# Altium PCB FiltrosRF_R00.PcbDoc
Units mil, origin at the board's own origin, x right, y up, seen from the top; angles counter-clockwise.
Board outline 2362.2 x 2755.91 mil, 2 copper layers (Top Layer, Bottom Layer); 32 components, 39 nets, 138 pads, 780 vias.
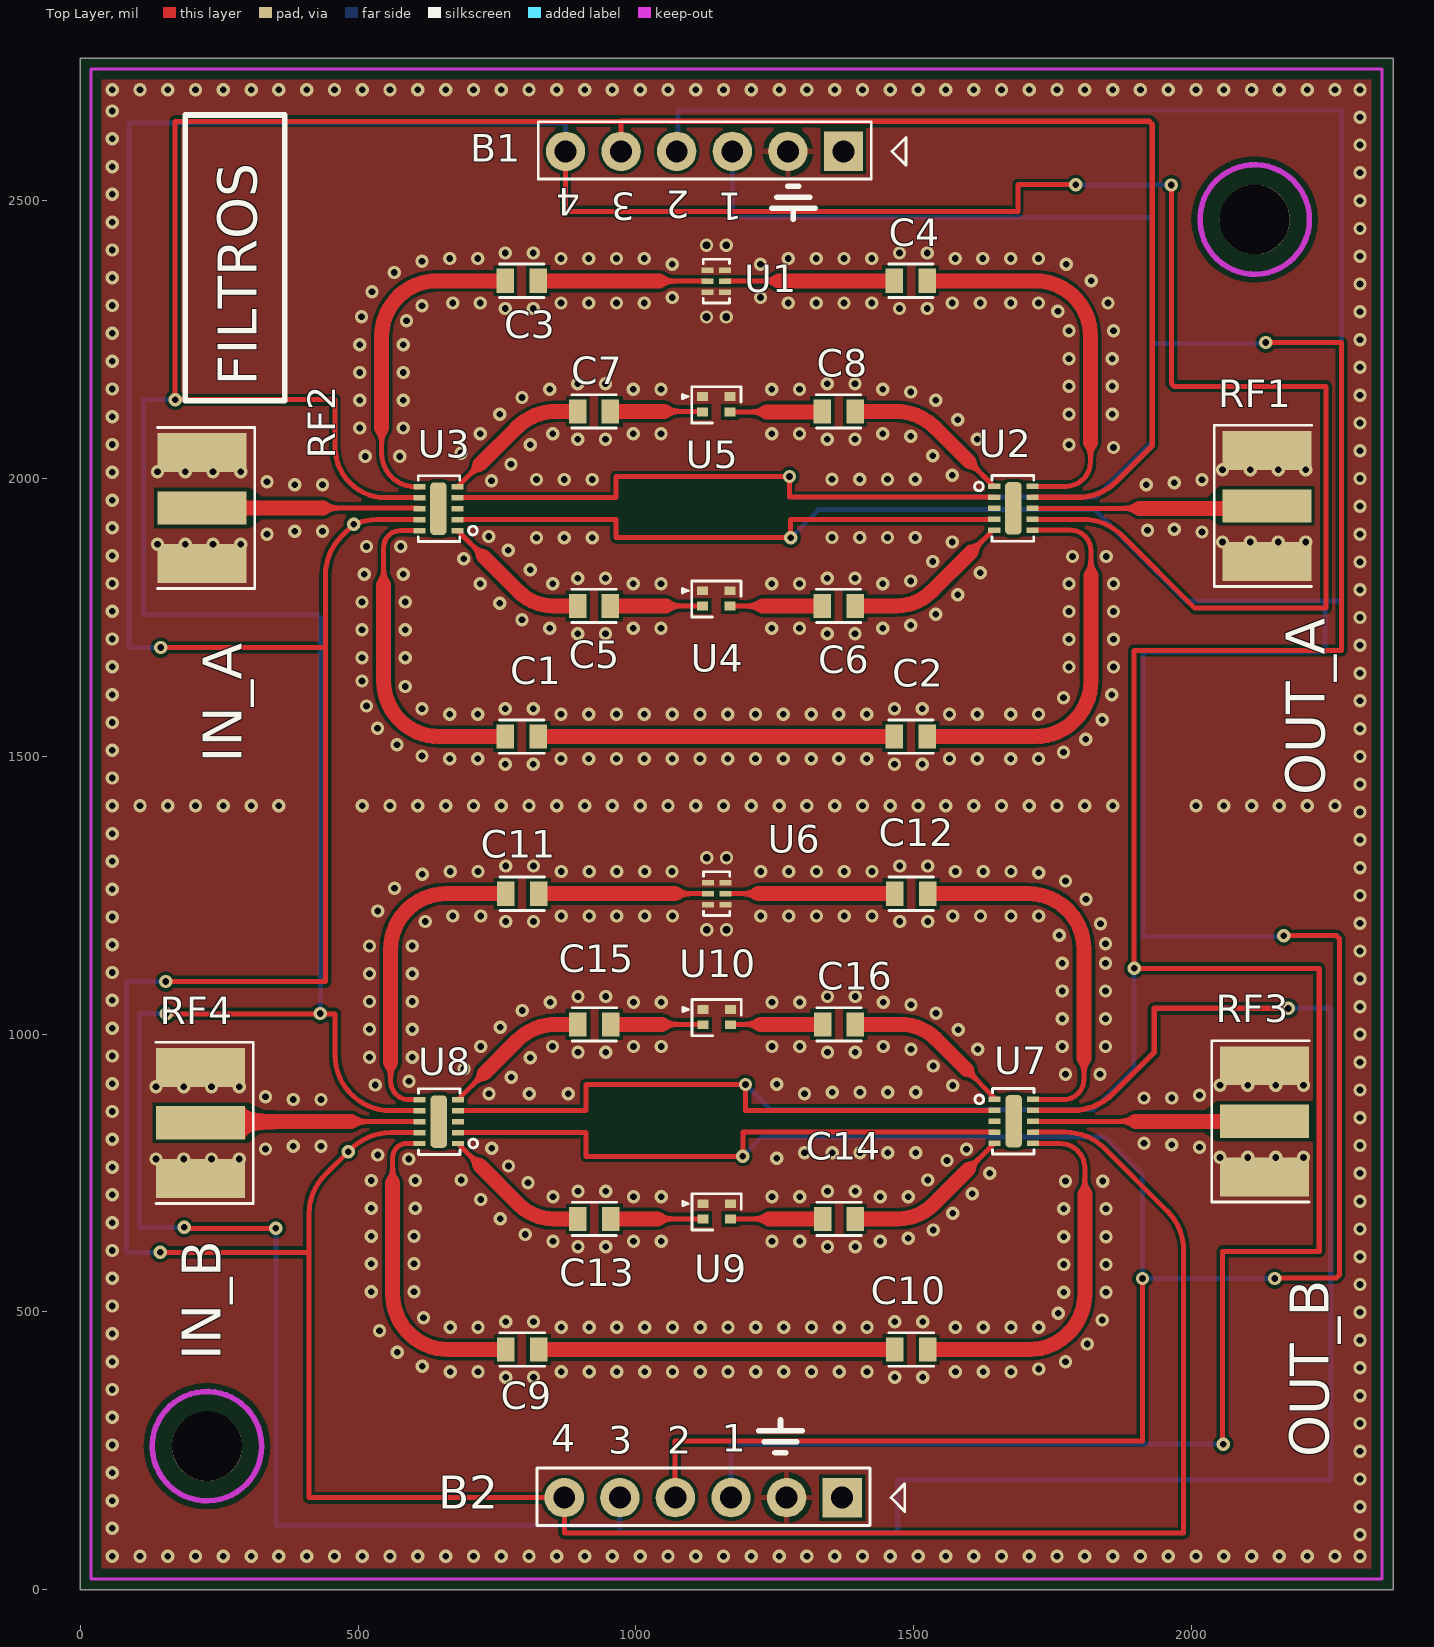
[diagram p0: Top Layer view]
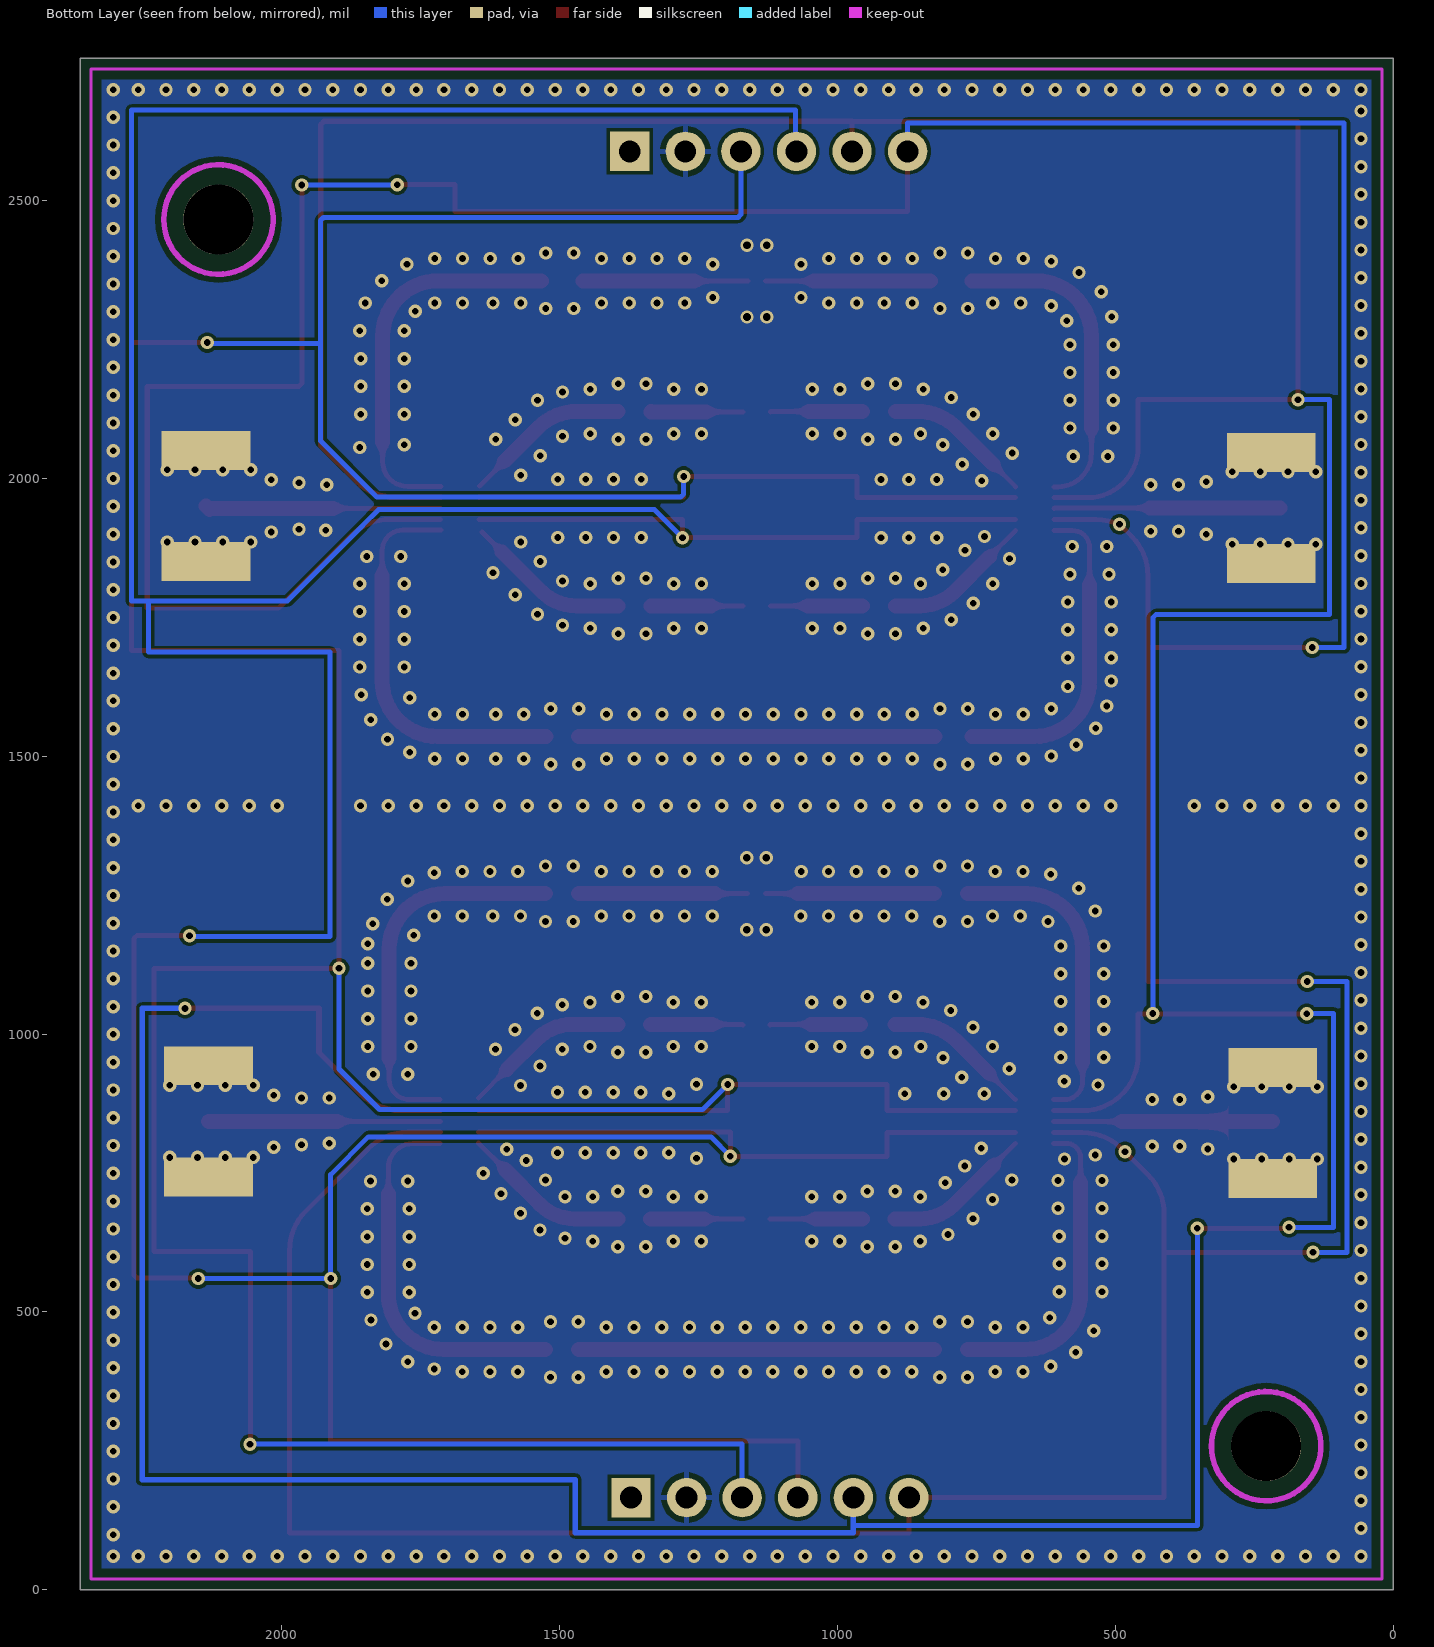
[diagram p1: Bottom Layer view, seen from below]
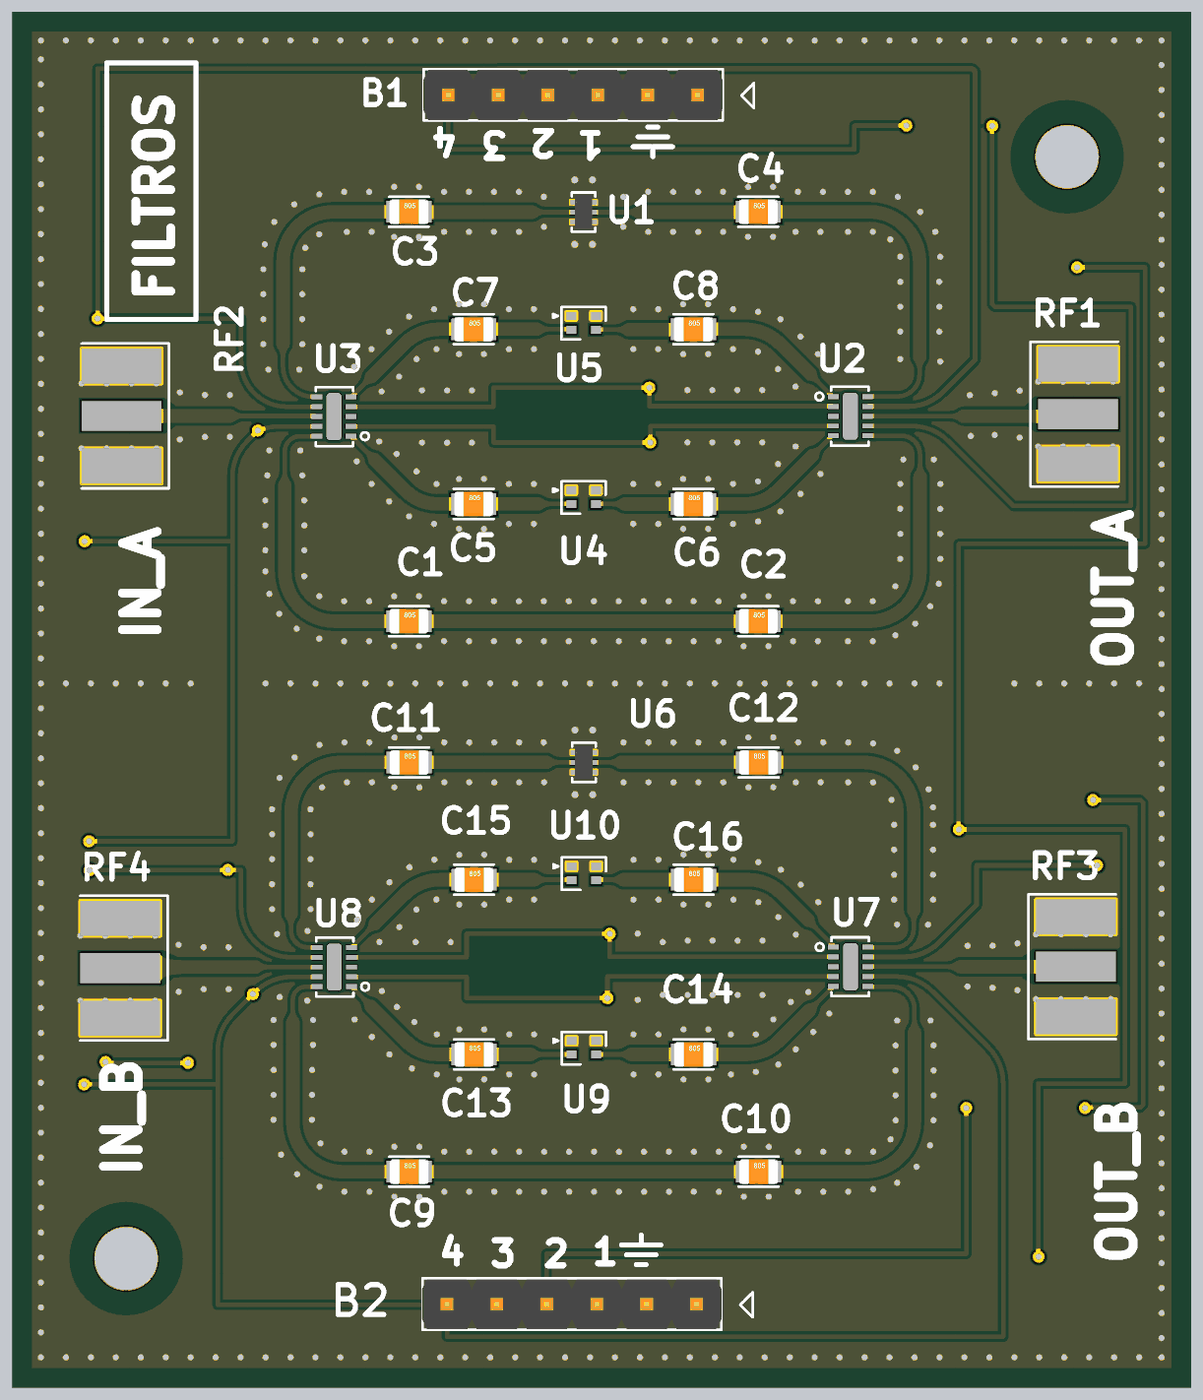
[diagram p2: 3D render of the assembled board from above, using the file's embedded part models]

## Layer stack, top to bottom
Top Solder: solder mask 0.4, Solder Resist, Dk 3.5
Top Layer: signal copper 1.4
Dielectric 1: dielectric 12.6, FR-4, Dk 4.8
Bottom Layer: signal copper 1.4
Bottom Solder: solder mask 0.4, Solder Resist, Dk 3.5

## Board outline
0,0 0,2755.91 2362.2,2755.91 2362.2,0

## Design rules (kind name [scope] priority, off if disabled: settings)
Clearance Clearance_1 [OnMid vs OnMid] p1: gap=6 ignorepadtopadclearanceinfootprint=FALSE sourcerule=39 cellrowname=All cellrowtype=0 cellcolname=All cellcoltype=0 innerlayers=TRUE
Clearance Clearance_2 [(ExistsOnLayer('Top Layer') Or ExistsOnLayer('Bottom Layer')) vs (ExistsOnLayer('Top Layer') Or ExistsOnLayer('Bottom Layer'))] p2: gap=6 ignorepadtopadclearanceinfootprint=FALSE sourcerule=39 cellrowname=All cellrowtype=0 cellcolname=All cellcoltype=0 outerlayers=TRUE
Clearance [All] p3: gap=10 ignorepadtopadclearanceinfootprint=FALSE ismatrix=TRUE
PolygonConnect [All] p1: thpad.connectstyle=Relief thpad.reliefconductorwidth=10 thpad.reliefentries=4 thpad.polygonreliefangle="90 Angle" thpad.airgapwidth=10 smdpad.connectstyle=Direct smdpad.reliefconductorwidth=10 smdpad.reliefentries=4 smdpad.polygonreliefangle="90 Angle" smdpad.airgapwidth=10 via.connectstyle=Direct via.reliefconductorwidth=10 via.reliefentries=4 via.polygonreliefangle="90 Angle" via.airgapwidth=10
RoutingVias RoutingViaStyle_1 [All] p1: holewidth=12 width=24 viastyle="Through Hole" minholewidth=12 minwidth=24 maxholewidth=24 maxwidth=50
RoutingVias [All] p2: holewidth=28 width=50 viastyle="Through Hole" minholewidth=28 minwidth=50 maxholewidth=28 maxwidth=50
SolderMaskExpansion [All] p1: expansion=4 istentingtop=FALSE
SupplyNets "Schematic Supply Nets" [InNet('GND')] p1: voltage=0.000
Width MaxMinWidth_1 [All] p1: maxlimit=100 minlimit=6 preferedwidth=8 minimp=50.000000 maximp=50.000000 favimp=50.000000
Width [All] p2: maxlimit=10 minlimit=10 preferedwidth=10
30 further rules are at their usual default settings.

## Components (designator, comment, footprint, x,y, rotation, side; value= is the part's Value field where it differs from the comment)
B1 "CONN_06P" "Header_M_1x6_0.1\"" 1373.38,2588.16 r180 top
B2 "CONN_06P" "Header_M_1x6_0.1\"" 1371.09,165.95 r180 top
C1 "Capacitor" C_0603 794.68,1535.28 r0 top value=47pF
C2 "Capacitor" C_0603 1494.68,1535.28 r0 top value=47pF
C3 "Capacitor" C_0603 794.68,2355.28 r0 top value=47pF
C4 "Capacitor" C_0603 1494.68,2355.28 r0 top value=47pF
C5 "Capacitor" C_0603 924.68,1770.28 r0 top value=47pF
C6 "Capacitor" C_0603 1364.68,1770.28 r0 top value=47pF
C7 "Capacitor" C_0603 924.68,2120.28 r0 top value=47pF
C8 "Capacitor" C_0603 1364.68,2120.28 r0 top value=47pF
C9 "Capacitor" C_0603 795.28,432.52 r0 top value=47pF
C10 "Capacitor" C_0603 1495.28,432.52 r0 top value=47pF
C11 "Capacitor" C_0603 795.28,1252.52 r0 top value=47pF
C12 "Capacitor" C_0603 1495.28,1252.52 r0 top value=47pF
C13 "Capacitor" C_0603 925.28,667.52 r0 top value=47pF
C14 "Capacitor" C_0603 1365.28,667.52 r0 top value=47pF
C15 "Capacitor" C_0603 925.28,1017.52 r0 top value=47pF
C16 "Capacitor" C_0603 1365.28,1017.52 r0 top value=47pF
RF1 "SMA_Connector" SMA_Connector 2135.38,1950.16 r270 top
RF2 "SMA_Connector" SMA_Connector 219.15,1946.46 r90 top
RF3 "SMA_Connector" SMA_Connector 2130.96,843.09 r270 top
RF4 "SMA_Connector" SMA_Connector 216.54,840.16 r90 top
U1 "3550LP14A0300001T" "Low Pass Filter 0603 6 Pins" 1144.68,2354.72 r0 top
U2 "SKY13322-375LF" "SP4T Switch RF" 1644.68,1985.28 r0 top
U3 "SKY13322-375LF" "SP4T Switch RF" 679.13,1905.91 r180 top
U4 "LP0603A-XXXX-ANTR" "Low Pass Filter 0603 4 Pins" 1144.68,1783.86 r0 top
U5 "LP0603A-XXXX-ANTR" "Low Pass Filter 0603 4 Pins" 1144.68,2133.07 r0 top
U6 "3550LP14A0300001T" "Low Pass Filter 0603 6 Pins" 1145.28,1252.52 r0 top
U7 "SKY13322-375LF" "SP4T Switch RF" 1645.28,882.52 r0 top
U8 "SKY13322-375LF" "SP4T Switch RF" 679.72,803.15 r180 top
U9 "LP0603A-XXXX-ANTR" "Low Pass Filter 0603 4 Pins" 1145.28,681.1 r0 top
U10 "LP0603A-XXXX-ANTR" "Low Pass Filter 0603 4 Pins" 1145.28,1030.52 r0 top

## Footprints (in the part's own frame and the unit in brackets; to place one, negate y for a bottom-side part, rotate by r counter-clockwise, add the part's x,y. Pads: shape width x height; smd on the part's side, far side on the other; paste and mask are expansions set on the pad)
C_0603 [mm] "Chip Capacitor, 2-Leads,"
  rect 0.8x1.1 smd: 1(-0.75,0) 2(0.75,0)
  silkscreen extent -1.02,-0.76 1.02,0.76, body extent -1,-0.62 1,0.63, height 0.78
"Header_M_1x6_0.1\"" [mm] "Header Male 1 x 6 Vias Pitch 100mils"
  rect 1.8x1.8 hole 1: 1(0,0)
  round 1.8 hole 1: 2(2.54,0) 3(5.08,0) 4(7.62,0) 5(10.16,0) 6(12.7,0)
  silkscreen extent -2.86,-1.35 13.95,1.27, body extent -1.27,-1.3 13.97,1.24, height 8.47
"Low Pass Filter 0603 4 Pins" [mm]
  rect 0.5x0.4 smd: 1(-0.625,0.35) 2(-0.625,-0.35) 3(0.625,-0.35) 4(0.625,0.35)
  silkscreen extent -1.55,-0.85 1.12,0.8
"Low Pass Filter 0603 6 Pins" [mm]
  rect 0.55x0.25 smd mask+0.06: 1(-0.4,0.5) 2(-0.4,0) 3(-0.4,-0.5) 4(0.4,-0.5) 5(0.4,0) 6(0.4,0.5)
  silkscreen extent -0.6,-1 0.6,1, body extent -0.45,-0.85 0.45,0.85, height 0.71
SMA_Connector [mil] "SMA PCB Connector 1.6mm / PN: EMPCB.CSMAFSTJ.A"
  rect 60x160 smd: 1(0,0)
  rect 70x160 smd: 2(-100,0) 2(100,0)
  rect 70x160 smd far side: 2(-100,0) 2(100,0)
  silkscreen extent -145,-95 145,80, body extent -121,-60 121,80, height 10
"SP4T Switch RF" [mm]
  rect 0.55x0.25 smd mask+0.05: 1(0,0) 2(0,-0.5) 3(0,-1) 4(0,-1.5) 5(0,-2) 6(1.75,-2) 7(1.75,-1.5) 8(1.75,-1) 9(1.75,-0.5) 10(1.75,0)
  rrect50% 0.76x2.4 smd mask+0.05: ""(0.875,-1)
  silkscreen extent -0.9,-2.5 1.8,0.5

## Part data
B1 B2: "Connector Generic 4 Vias"
RF1 RF2 RF3 RF4: "Connector SMA"
U1 U6: "RF FILTER LOW PASS  0603"
U2 U3 U7 U8: "RF Switch IC General Purpose SP4T 6 GHz 50Ohm 10-MLPD (3x2)"
U4 U5 U9 U10: "RF FILTER 0603"
C1 C2 C3 C4 C5 C6 C7 C8 C9 C10 C11 C12 C13 C14 C15 C16: SimulationGenericComponent=True

## Free pads (board coordinates)
  round 125.98 hole 125.98: ""(228.28,258.52) ""(2113.28,2465.52)

## Via types
v1: diameter 24, hole 12, Top Layer to Bottom Layer, tented top, 749 vias
v2: diameter 24, hole 12, Top Layer to Bottom Layer, 23 vias
v3: diameter 24, hole 13.78, Top Layer to Bottom Layer, tented top, 4 vias
v4: diameter 24.02, hole 13.78, Top Layer to Bottom Layer, tented top, 4 vias

## Nets (pads, with @x,y where several pads share a name; then routed paths per layer and width w, separated by ;. In a path a pad name is that pad's centre, name@x,y a point inside that pad or via, vN(x,y) a via of type N, cw(c..) or ccw(c..) an arc to the next point about the centre after c; other vN are vias at no path point)
1A_IN: C7.1 U3.5 | length 267.9
  Top Layer w9: U3.5 719.68,2025.2
  Top Layer w27: 719.68,2025.2 785.47,2090.99 cw(c856.19,2020.28) 856.19,2120.28 C7.1
1A_OUT: C6.2 U2.5 | length 296.2
  Top Layer w9: 1602.87,1867.04 U2.5@1639.13,1903.3
  Top Layer w27: C6.2 1469.01,1770.28 ccw(c1469.01,1859.84) 1532.34,1796.51 1602.87,1867.04
1B_IN: C15.1 U8.5 | length 267.9
  Top Layer w9: U8.5 727.54,929.7
  Top Layer w27: 727.54,929.7 786.06,988.23 cw(c856.78,917.52) 856.78,1017.52 C15.1
1B_OUT: C14.2 U7.5 | length 303
  Top Layer w9: 1597.78,756.28 U7.5
  Top Layer w27: C14.2 1471.79,667.52 ccw(c1471.79,757.38) 1535.34,693.84 1597.78,756.28
2A_IN: C5.1 U3.1 | length 268.4
  Top Layer w9: U3.1 726.38,1858.66
  Top Layer w27: 726.38,1858.66 789.21,1795.82 ccw(c850.9,1857.51) 850.9,1770.28 C5.1
2A_OUT: C8.2 U2.1 | length 300.3
  Top Layer w9: 1598.72,2030.61 U2.1@1643.21,1986.12
  Top Layer w27: C8.2 1467.63,2120.28 cw(c1467.63,2020.28) 1538.34,2090.99 1598.72,2030.61
2B_IN: C13.1 U8.1 | length 268.4
  Top Layer w9: U8.1 719.29,763.58
  Top Layer w27: 719.29,763.58 789.81,693.07 ccw(c851.49,754.75) 851.49,667.52 C13.1
2B_OUT: C16.2 U7.1 | length 302.2
  Top Layer w9: 1594.49,936.61 U7.1@1645.67,884.65
  Top Layer w27: C16.2 1475.78,1017.52 cw(c1475.78,926.26) 1540.31,990.79 1594.49,936.61
3A_IN: C3.1 U3.6 | length 584.2
  Top Layer w9: 542.52,2090.16 542.52,2045.28 ccw(c603.15,2045.28) 603.15,1984.65 U3.6
  Top Layer w27: 542.52,2090.16 542.52,2255.28 cw(c642.52,2255.28) 642.52,2355.28 C3.1@757.28,2355.28
3A_OUT: C2.2 U2.6 | length 712.6
  Top Layer w9: U2.6@1713.19,1906.86 1781.3,1906.86 cw(c1781.3,1869.46) 1818.7,1869.46 1818.7,1824.97
  Top Layer w27: C2.2 1718.7,1535.28 ccw(c1718.7,1635.28) 1818.7,1635.28 1818.7,1824.97
3B_IN: C11.1 U8.6 | length 572.8
  Top Layer w9: 558.66,948.82 558.66,914.96 ccw(c591.73,914.96) 591.73,881.89 U8.6
  Top Layer w27: 558.66,948.82 558.66,1152.52 cw(c658.66,1152.52) 658.66,1252.52 C11.1
3B_OUT: C10.2 U7.6 | length 684
  Top Layer w9: U7.6@1715.11,803.15 1763.14,803.15 cw(c1763.14,758.66) 1807.63,758.66 1807.63,712.2
  Top Layer w27: C10.2 1707.63,432.52 ccw(c1707.63,532.52) 1807.63,532.52 1807.63,712.2
4A_IN: C1.1 U3.10 | length 590.1
  Top Layer w9: 546.06,1808.27 546.06,1875.59 cw(c576.38,1875.59) 576.38,1905.91 U3.10
  Top Layer w27: 546.06,1808.27 546.06,1635.28 ccw(c646.06,1635.28) 646.06,1535.28 C1.1@757.28,1535.28
4A_OUT: C4.2 U2.10 | length 698.3
  Top Layer w9: U2.10@1713.19,1985.6 1770.28,1985.6 1773.43,1985.56 ccw(c1773.43,2030.05) 1817.91,2030.05 1817.91,2064.3
  Top Layer w27: C4.2@1532.09,2355.28 1717.91,2355.28 cw(c1717.91,2255.28) 1817.91,2255.28 1817.91,2064.3
4B_IN: C9.1 U8.10 | length 568.9
  Top Layer w9: 562.2,732.28 562.2,777.56 cw(c587.8,777.56) 587.8,803.15 U8.10
  Top Layer w27: 562.2,732.28 562.2,532.52 ccw(c662.2,532.52) 662.2,432.52 C9.1
4B_OUT: C12.2 U7.10 | length 684
  Top Layer w9: U7.10@1715.11,881.89 1769.04,881.89 ccw(c1769.04,918.9) 1806.05,918.9 1806.05,956.3
  Top Layer w27: C12.2 1706.05,1252.52 cw(c1706.05,1152.52) 1806.05,1152.52 1806.05,956.3
CTRL1: B1.3 B2.3 U2.2 U3.4 U7.2 U8.4 | length 9214.5
  Top Layer w9: U3.4 964.38,1964.96 964.38,2003.16 v2(1276.38,2003.16) 1276.38,1966.16 1644.68,1966.16 U2.2 ; U8.4 910.38,862.2 910.38,909.16 v2(1197.11,909.16) 1197.11,862.83 U7.2 ; v2(2056.38,262.16) 2055.38,262.16 2055.38,609.16 2229.38,609.16 2229.38,1118.16 v2(1896.38,1118.16) 1896.38,1690.16 2269.38,1690.16 2269.38,2244.16 v2(2133.38,2244.16)
  Bottom Layer w9: B2.3 1171.09,262.16 v2(2056.38,262.16) ; B1.3 1173.38,2474.44 1178.66,2469.16 1924.29,2469.16 1929.56,2463.89 1929.56,2242.16 ; v2(1197.11,909.16) 1242.11,864.16 1823.38,864.16 1896.38,937.16 v2@1896.38,1117.16 ; v2(1276.38,2003.16) 1276.38,1971.44 1281.66,1966.16 1828.4,1966.16 1929.56,2067.33 1929.56,2242.16 ; v2(2133.38,2244.16) 2133.38,2242.16 1929.56,2242.16
CTRL2: B1.4 B2.4 U2.4 U3.2 U7.4 U8.2 | length 9753
  Top Layer w9: U3.2 964.38,1925.59 964.38,1893.16 v2(1278.38,1893.16) 1278.38,1926.22 U2.4 ; U8.2 910.38,822.83 910.38,780.16 v2(1192.38,780.16) 1192.38,823.46 U7.4 ; B2.4 1070.38,165.95 1070.38,268.16 1911.38,268.16 v2(1911.38,560.16) ; v2(2149.38,560.16) 2149.38,561.16 2260.11,561.16 2265.38,566.44 2265.38,1171.89 2260.11,1177.16 v2(2165.38,1177.16)
  Bottom Layer w9: B2.4 B2.4@1073.38,165.95 ; B1.4 1075.38,2588.16 1075.38,2662.16 2269.28,2662.16 2269.28,1779.16 2239.38,1779.16 ; v2(1192.38,780.16) 1227.24,815.02 1843.53,815.02 1911.38,747.16 v2(1911.38,560.16) v2(2149.38,560.16) ; v2(1278.38,1893.16) 1328.74,1943.52 1825.28,1943.52 1854.38,1914.41 1854.38,1914.16 1989.38,1779.16 2239.38,1779.16 ; v2(2165.38,1177.16) 2165.38,1175.16 1912.38,1175.16 1912.38,1687.16 2239.38,1687.16 2239.38,1779.16
CTRL3: B1.5 B2.5 U2.9 U3.7 U7.9 U8.7 | length 10556
  Top Layer w9: v2(155.15,1036.46) 458.66,1036.46 458.66,962.2 ccw(c558.66,962.2) 558.66,862.2 U8.7 ; v2(187.15,652.46) 187.15,650.46 v2(352.15,650.46) ; U3.7 549.84,1964.96 cw(c549.84,2056.14) 458.66,2056.14 458.66,2141.46 v2(171.15,2141.46) 171.15,2642.16 973.38,2642.16 B1.5
  Top Layer w10: 973.38,2642.16 1923.42,2642.16 1929.28,2636.31 1929.28,2059.06 1864.4,1994.18 cw(c1795.38,2063.19) 1795.38,1965.59 U2.9 ; U7.9 1786.63,862.83 ccw(c1786.63,962.83) 1857.34,892.12 1932.38,967.16 1932.38,1046.16 v2(2173.38,1046.16)
  Bottom Layer w9: v2(155.15,1036.46) 155.15,1037.46 107.15,1037.46 107.15,652.46 v2(187.15,652.46) ; v2(171.15,2141.46) 114.15,2141.46 114.15,1754.46 426.88,1754.46 432.15,1749.18 v2(432.15,1037.01) ; v2(352.15,650.46) 352.15,116.16 971.09,116.16
  Bottom Layer w10: B2.5 971.09,116.16 971.09,103.16 1471.38,103.16 1471.38,198.43 2250.38,198.43 2250.38,1046.16 v2(2173.38,1046.16)
CTRL4: B1.6 B2.6 U2.7 U3.9 U7.7 U8.9 | length 10445.4
  Top Layer w9: v2(144.15,607.46) 411.81,607.46 ; v2(145.15,1695.46) 438.74,1695.46 ccw(c438.74,1698.87) 441.15,1696.46 ; v2(154.15,1094.46) 441.15,1094.46 441.15,1696.46 ; v2(482.28,788.43) 441.1,747.24 ccw(c511.81,676.53) 411.81,676.53 411.81,607.46 ; v2@483.19,788.44 cw(c558.66,722.83) 558.66,822.83 U8.9 ; v2@491.68,1916.22 cw(c533.94,1825.59) 533.94,1925.59 U3.9 ; v2(492.13,1917.32) 470.44,1895.64 ccw(c541.15,1824.93) 441.15,1824.93 441.15,1696.46 ; B1.6 873.38,2480.16 1687.38,2480.16 1687.38,2528.16 v2(1791.38,2528.16) ; U2.7 1803.9,1926.22 cw(c1803.9,1826.22) 1874.62,1896.93 2005.38,1766.16 2241.38,1766.16 2241.38,2165.16 1968.55,2165.16 1963.28,2170.44 v2(1963.28,2527.52) ; U7.7 1772.66,823.46 cw(c1772.66,723.46) 1843.37,794.18 1956.09,681.45 cw(c1885.38,610.74) 1985.38,610.74 1985.38,102.15 871.09,102.15 B2.6 411.81,165.95 411.81,607.46
  Bottom Layer w9: v2(144.15,607.46) 83.15,607.46 83.15,1094.46 v2(154.15,1094.46) ; v2(145.15,1695.46) 87.96,1695.46 87.96,2638.98 873.38,2638.98 B1.6 ; v2(492.13,1917.32) v2@492.58,1917.78 ; v2(1791.38,2528.16) 1791.71,2527.84 1962.95,2527.84 v2(1963.28,2527.52)
GND: B1.2 B2.2 RF1.2 RF2.2 RF3.2 RF4.2 U1.1 U1.3 U1.4 U1.6 U4.1 U4.4 U5.1 U5.4 U6.1 U6.3 U6.4 U6.6 U9.1 U9.4 U10.1 U10.4
  other v1: 57.64,60.68 107.64,60.68 157.64,60.68 207.64,60.68 257.64,60.68 307.64,60.68 357.64,60.68 407.64,60.68 457.64,60.68 507.64,60.68 557.64,60.68 607.64,60.68 657.64,60.68 707.64,60.68 757.64,60.68 807.64,60.68 857.64,60.68 907.64,60.68 957.64,60.68 1007.64,60.68 1057.64,60.68 1107.64,60.68 1157.64,60.68 1207.64,60.68 1257.64,60.68 1307.64,60.68 1357.64,60.68 1407.64,60.68 1457.64,60.68 1507.64,60.68 1557.64,60.68 1607.64,60.68 1657.64,60.68 1707.64,60.68 1757.64,60.68 1807.64,60.68 1857.64,60.68 1907.64,60.68 1957.64,60.68 2007.64,60.68 2057.64,60.68 2107.64,60.68 2157.64,60.68 2207.64,60.68 2257.64,60.68 2302.64,60.68 2302.64,99.44 57.64,110.68 2302.64,149.44 57.64,160.68 2302.64,199.44 57.64,210.68 2302.64,249.44 57.64,260.68 2302.64,299.44 57.64,310.68 2302.64,349.44 57.64,360.68 765.75,382.52 815.75,382.52 1465.75,382.52 1515.75,382.52 665.75,392.52 715.75,392.52 865.75,392.52 915.75,392.52 965.75,392.52 1015.75,392.52 1065.75,392.52 1115.75,392.52 1165.75,392.52 1215.75,392.52 1265.75,392.52 1315.75,392.52 1365.75,392.52 1415.75,392.52 1574.8,392.52 1624.8,392.52 1674.8,392.52 1724.8,397.52 2302.64,399.44 615.75,402.52 57.64,410.68 1772.8,410.52 570.75,427.52 1811.8,442.52 2302.64,449.44 57.64,460.68 538.75,466.52 665.75,472.52 715.75,472.52 865.75,472.52 915.75,472.52 965.75,472.52 1015.75,472.52 1065.75,472.52 1115.75,472.52 1165.75,472.52 1215.75,472.52 1265.75,472.52 1315.75,472.52 1365.75,472.52 1415.75,472.52 1574.8,472.52 1624.8,472.52 1674.8,472.52 1724.8,472.52 765.75,482.52 815.75,482.52 1465.75,482.52 1515.75,482.52 1838.8,485.52 617.75,489.52 1759.8,497.52 2302.64,499.44 57.64,510.68 1769.8,535.52 1845.8,535.52 523.75,536.52 600.75,536.52 2302.64,549.44 57.64,560.68 1769.8,585.52 1845.8,585.52 523.75,586.52 600.75,586.52 2302.64,599.44 57.64,610.68 895.75,617.52 945.75,617.52 1344.8,617.52 1394.8,617.52 850.75,627.52 995.75,627.52 1045.75,627.52 1244.8,627.52 1294.8,627.52 1439.8,627.52 1489.8,632.52 1769.8,635.52 1845.8,635.52 523.75,636.52 600.75,636.52 800.75,639.52 1534.8,647.52 2302.64,649.44 57.64,660.68 755.75,667.52 1569.8,677.52 1769.8,685.52 1845.8,685.52 523.75,686.52 602.75,686.52 2302.64,699.44 720.75,702.52 850.75,707.52 995.75,707.52 1045.75,707.52 1244.8,707.52 1294.8,707.52 1439.8,707.52 1489.8,707.52 57.64,710.68 1604.8,712.52 895.75,717.52 945.75,717.52 1344.8,717.52 1394.8,717.52 805.75,732.52 1772.8,735.52 1839.8,735.52 523.75,736.52 602.75,736.52 685.75,737.52 1524.8,737.52 2302.64,749.44 1636.8,749.52 57.64,760.68 770.75,762.52 1559.8,772.52 136.54,775.16 186.54,775.16 236.54,775.16 286.54,775.16 591.12,775.25 1253.28,776.78 2050.96,778.09 2100.96,778.09 2150.96,778.09 2200.96,778.09 535.75,782.52 1303.28,786.52 1353.28,786.52 1403.28,786.52 1453.28,786.52 1503.28,786.52 333.54,793.16 1594.8,792.52 740.75,794.52 2013.96,796.09 383.54,798.16 433.54,798.16 2302.64,799.44 1963.96,801.09 1913.96,803.52 57.64,810.68 2302.64,849.44 57.64,860.68 383.54,882.16 433.54,882.16 1913.96,885.09 1963.96,885.09 333.54,887.16 2013.96,890.09 735.75,892.52 808.28,892.52 878.28,892.52 1303.28,892.52 1353.28,895.52 1403.28,895.52 1453.28,895.52 1503.28,895.52 2302.64,899.44 136.54,905.16 186.54,905.16 236.54,905.16 286.54,905.16 1569.8,907.52 2050.96,908.09 2100.96,908.09 2150.96,908.09 2200.96,908.09 530.75,908.52 1253.28,909.52 57.64,910.68 591.73,914.96 775.75,922.52 1772.8,927.52 1834.8,927.52 690.75,937.52 1534.8,942.52 2302.64,949.44 809.8,957.52 520.75,958.52 597.75,958.52 57.64,960.68 895.75,967.52 945.75,967.52 1344.8,967.52 1394.8,967.52 1494.8,972.52 1614.8,972.52 720.75,977.52 849.8,977.52 995.75,977.52 1045.75,977.52 1244.8,977.52 1294.8,977.52 1444.8,977.52 1766.8,977.52 1844.8,977.52 2302.64,999.44 1579.8,1007.52 520.75,1008.52 597.75,1008.52 57.64,1010.68 755.75,1012.52 1766.8,1027.52 1844.8,1027.52 1539.8,1037.52 795.75,1042.52 2302.64,1049.44 1494.8,1052.52 845.75,1057.52 995.75,1057.52 1045.75,1057.52 1244.8,1057.52 1294.8,1057.52 1444.8,1057.52 520.75,1058.52 597.75,1058.52 57.64,1060.68 895.75,1067.52 945.75,1067.52 1344.8,1067.52 1394.8,1067.52 1766.8,1077.52 1844.8,1077.52 2302.64,1099.44 520.75,1108.52 597.75,1108.52 57.64,1110.68 1766.8,1127.52 1844.8,1127.52 2302.64,1149.44 520.75,1158.52 597.75,1158.52 57.64,1160.68 1844.8,1162.52 1761.8,1177.52 1835.8,1198.52 2302.64,1199.44 620.75,1202.52 765.75,1202.52 815.75,1202.52 1474.8,1202.52 1524.8,1202.52 57.64,1210.68 670.75,1212.52 720.75,1212.52 865.75,1212.52 915.75,1212.52 965.75,1212.52 1015.75,1212.52 1065.75,1212.52 1224.8,1212.52 1274.8,1212.52 1324.8,1212.52 1374.8,1212.52 1424.8,1212.52 1569.8,1212.52 1619.8,1212.52 1674.8,1212.52 1724.8,1212.52 535.75,1221.52 1809.8,1242.52 2302.64,1249.44 57.64,1260.68 565.75,1262.52 1772.8,1275.52 615.75,1287.52 1724.8,1290.52 665.75,1292.52 715.75,1292.52 865.75,1292.52 915.75,1292.52 965.75,1292.52 1015.75,1292.52 1064.8,1292.52 1224.8,1292.52 1274.8,1292.52 1324.8,1292.52 1374.8,1292.52 1424.8,1292.52 1574.8,1292.52 1624.8,1292.52 1674.8,1292.52 2302.64,1299.44 765.75,1302.52 815.75,1302.52 1474.8,1302.52 1524.8,1302.52 57.64,1310.68 2302.64,1349.44 57.64,1360.68 2302.64,1399.44 57.64,1410.68 107.64,1410.68 157.64,1410.68 207.64,1410.68 257.64,1410.68 307.64,1410.68 357.64,1410.68 507.64,1410.68 557.64,1410.68 607.64,1410.68 657.64,1410.68 707.64,1410.68 757.64,1410.68 807.64,1410.68 857.64,1410.68 907.64,1410.68 957.64,1410.68 1007.64,1410.68 1057.64,1410.68 1107.64,1410.68 1157.64,1410.68 1207.64,1410.68 1257.64,1410.68 1307.64,1410.68 1357.64,1410.68 1407.64,1410.68 1457.64,1410.68 1507.64,1410.68 1557.64,1410.68 1607.64,1410.68 1657.64,1410.68 1707.64,1410.68 1757.64,1410.68 1807.64,1410.68 1857.64,1410.68 2007.64,1410.68 2057.64,1410.68 2107.64,1410.68 2157.64,1410.68 2207.64,1410.68 2257.64,1410.68 2302.64,1449.44 57.64,1460.68 765.16,1485.28 815.16,1485.28 1465.16,1485.28 1515.16,1485.28 665.16,1495.28 715.16,1495.28 865.16,1495.28 915.16,1495.28 965.16,1495.28 1015.16,1495.28 1065.16,1495.28 1115.16,1495.28 1165.16,1495.28 1215.16,1495.28 1265.16,1495.28 1315.16,1495.28 1365.16,1495.28 1415.16,1495.28 1564.21,1495.28 1614.21,1495.28 1674.21,1495.28 1724.21,1495.28 2302.64,1499.44 615.16,1500.28 1769.21,1507.28 57.64,1510.68 570.16,1520.28 1809.21,1530.28 2302.64,1549.44 535.16,1550.28 57.64,1560.68 1839.21,1565.28 665.16,1575.28 715.16,1575.28 865.16,1575.28 915.16,1575.28 965.16,1575.28 1015.16,1575.28 1065.16,1575.28 1115.16,1575.28 1165.16,1575.28 1215.16,1575.28 1265.16,1575.28 1315.16,1575.28 1365.16,1575.28 1415.16,1575.28 1564.21,1575.28 1614.21,1575.28 1674.21,1575.28 1724.21,1575.28 615.16,1585.28 765.16,1585.28 815.16,1585.28 1465.16,1585.28 1515.16,1585.28 515.16,1590.28 2302.64,1599.44 1769.21,1605.28 1856.21,1610.28 57.64,1610.68 585.16,1625.28 507.16,1635.28 2302.64,1649.44 1779.21,1660.28 1859.21,1660.28 57.64,1660.68 507.16,1677.28 585.16,1677.28 2302.64,1699.44 1779.21,1710.28 1859.21,1710.28 57.64,1710.68 895.16,1720.28 945.16,1720.28 1344.21,1720.28 1394.21,1720.28 507.16,1727.28 585.16,1727.28 845.16,1730.28 995.16,1730.28 1045.16,1730.28 1244.21,1730.28 1294.21,1730.28 1444.21,1730.28 1494.21,1735.28 795.16,1745.28 2302.64,1749.44 1539.21,1755.28 1779.21,1760.28 1859.21,1760.28 57.64,1760.68 755.16,1775.28 507.06,1777.28 585.16,1777.28 1579.21,1790.28 2302.64,1799.44 720.16,1810.28 850.16,1810.28 995.16,1810.28 1045.16,1810.28 1244.21,1810.28 1294.21,1810.28 1444.21,1810.28 1779.21,1810.28 1859.21,1810.28 57.64,1810.68 1494.21,1815.28 895.16,1820.28 945.16,1820.28 1344.21,1820.28 1394.21,1820.28 511.16,1827.28 581.16,1827.28 1619.21,1830.28 810.16,1835.28 2302.64,1849.44 1534.21,1850.28 690.16,1855.28 1785.38,1859.16 1846.38,1859.16 57.64,1860.68 770.16,1870.28 515.16,1877.28 577.16,1877.28 139.15,1881.46 189.15,1881.46 239.15,1881.46 289.15,1881.46 1569.21,1885.28 2055.38,1885.16 2105.38,1885.16 2155.38,1885.16 2205.38,1885.16 821.13,1892.91 871.13,1892.91 921.13,1892.91 1352.68,1893.54 1402.68,1893.54 1452.68,1893.54 1502.68,1893.54 735.16,1895.28 336.15,1899.46 2302.64,1899.44 2018.38,1903.16 386.15,1904.46 436.15,1904.46 1920.38,1906.16 1968.38,1908.16 57.64,1910.68 2302.64,1949.44 57.64,1960.68 386.15,1988.46 436.15,1988.46 1918.38,1988.16 1968.38,1992.16 336.15,1993.46 740.16,1995.28 2018.38,1997.16 821.13,1997.65 871.13,1997.65 921.13,1997.65 1352.68,1998.28 1402.68,1998.28 1452.68,1998.28 1502.68,1998.28 2302.64,1999.44 1569.21,2005.28 57.64,2010.68 139.15,2011.46 189.15,2011.46 239.15,2011.46 289.15,2011.46 2055.38,2015.16 2105.38,2015.16 2155.38,2015.16 2205.38,2015.16 775.16,2025.28 513.16,2039.28 575.16,2039.28 1534.21,2040.28 685.16,2045.28 2302.64,2049.44 1859.21,2055.28 810.16,2060.28 1779.21,2060.28 57.64,2060.68 895.16,2070.28 945.16,2070.28 1344.21,2070.28 1394.21,2070.28 1614.21,2070.28 1494.21,2075.28 720.16,2080.28 850.16,2080.28 995.16,2080.28 1045.16,2080.28 1244.21,2080.28 1294.21,2080.28 1444.21,2080.28 503.16,2090.28 581.16,2090.28 2302.64,2099.44 1579.21,2105.28 57.64,2110.68 755.16,2115.28 1779.21,2115.28 1857.21,2115.28 503.16,2140.28 581.16,2140.28 1539.21,2140.28 795.16,2145.28 2302.64,2149.44 1494.21,2155.28 845.16,2160.28 995.16,2160.28 1045.16,2160.28 1244.21,2160.28 1294.21,2160.28 1444.21,2160.28 57.64,2160.68 1779.21,2165.28 1857.21,2165.28 895.16,2170.28 945.16,2170.28 1344.21,2170.28 1394.21,2170.28 503.16,2190.28 581.16,2190.28 2302.64,2199.44 57.64,2210.68 1779.21,2215.28 1857.21,2215.28 503.16,2240.28 581.16,2240.28 2302.64,2249.44 57.64,2260.68 1779.21,2265.28 1859.21,2265.28 587.16,2283.28 506.16,2290.28 2302.64,2299.44 1759.21,2300.28 765.16,2305.28 815.16,2305.28 1474.21,2305.28 1524.21,2305.28 615.16,2310.28 57.64,2310.68 670.16,2315.28 720.16,2315.28 865.16,2315.28 915.16,2315.28 965.16,2315.28 1015.16,2315.28 1274.21,2315.28 1324.21,2315.28 1374.21,2315.28 1424.21,2315.28 1569.21,2315.28 1619.21,2315.28 1674.21,2315.28 1724.21,2315.28 1849.21,2315.28 1065.16,2325.28 1224.21,2325.28 525.16,2335.28 2302.64,2349.44 1819.21,2355.28 57.64,2360.68 565.16,2370.28 1065.16,2385.28 1224.21,2385.28 1774.21,2385.28 615.16,2390.28 665.16,2395.28 715.16,2395.28 865.16,2395.28 915.16,2395.28 965.16,2395.28 1015.16,2395.28 1274.21,2395.28 1324.21,2395.28 1374.21,2395.28 1424.21,2395.28 1574.21,2395.28 1624.21,2395.28 1674.21,2395.28 1724.21,2395.28 2302.64,2399.44 765.16,2405.28 815.16,2405.28 1474.21,2405.28 1524.21,2405.28 57.64,2410.68 2302.64,2449.44 57.64,2460.68 2302.64,2499.44 57.64,2510.68 2302.64,2549.44 57.64,2560.68 2302.64,2599.44 57.64,2610.68 2302.64,2649.44 57.64,2660.68 57.64,2698.68 107.64,2698.68 157.64,2698.68 207.64,2698.68 257.64,2698.68 307.64,2698.68 357.64,2698.68 407.64,2698.68 457.64,2698.68 507.64,2698.68 557.64,2698.68 607.64,2698.68 657.64,2698.68 707.64,2698.68 757.64,2698.68 807.64,2698.68 857.64,2698.68 907.64,2698.68 957.64,2698.68 1007.64,2698.68 1057.64,2698.68 1107.64,2698.68 1157.64,2698.68 1207.64,2698.68 1257.64,2698.68 1307.64,2698.68 1357.64,2698.68 1407.64,2698.68 1457.64,2698.68 1507.64,2698.68 1557.64,2698.68 1607.64,2698.68 1657.64,2698.68 1707.64,2698.68 1757.64,2698.68 1807.64,2698.68 1857.64,2698.68 1907.64,2698.68 1957.64,2698.68 2007.64,2698.68 2057.64,2698.68 2107.64,2698.68 2157.64,2698.68 2207.64,2698.68 2257.64,2698.68 2302.64,2698.68
  other v3: 1127.53,1187.83 1163.02,1317.2 1162.43,2290.04 1162.43,2419.41
  other v4: 1163.02,1187.83 1127.53,1317.2 1126.94,2290.04 1126.94,2419.41
IN_A: RF2.1 U3.8 | length 407.4
  Top Layer w9: 437.01,1946.46 607.38,1946.46 cw(c607.38,1942.42) U3.8
  Top Layer w27: RF2.1@203.15,1946.46 RF2.1 437.01,1946.46
IN_B: RF4.1 U8.8 | length 394.3
  Top Layer w9: 487.8,842.52 U8.8
  Top Layer w27: RF4.1@216.54,842.52 487.8,842.52
NetC1_2: C1.2 C2.1 | length 640.9
  Top Layer w27: C1.2 C2.1
NetC3_2: C3.2 U1.2 | length 296.3
  Top Layer w9: 1042.32,2354.72 U1.2
  Top Layer w27: C3.2@832.64,2354.72 1042.32,2354.72
NetC4_1: C4.1 U1.5 | length 297.4
  Top Layer w9: U1.5 1256.53,2354.72
  Top Layer w27: 1256.53,2354.72 1457.28,2354.72 C4.1@1457.28,2355.28
NetC5_2: C5.2 U4.2 | length 166.1
  Top Layer w9: 1053.94,1770.28 1120.08,1770.28 U4.2
  Top Layer w27: C5.2 1053.94,1770.28
NetC6_1: C6.1 U4.3 | length 166.1
  Top Layer w9: U4.3 1227.36,1770.08
  Top Layer w27: 1227.36,1770.08 1335.16,1770.08 C6.1
NetC7_2: C7.2 U5.2 | length 166.3
  Top Layer w9: 1050.98,2120.28 1119.09,2120.28 U5.2
  Top Layer w27: C7.2 1050.98,2120.28
NetC8_1: C8.1 U5.3 | length 166.9
  Top Layer w9: U5.3 1235.24,2119.29
  Top Layer w27: 1235.24,2119.29 1335.16,2119.29 C8.1
NetC9_2: C9.2 C10.1 | length 640.9
  Top Layer w27: C9.2 C10.1
NetC11_2: C11.2 U6.2 | length 304.7
  Top Layer w9: 1070.47,1252.52 U6.2
  Top Layer w27: C11.2 1070.47,1252.52
NetC12_1: C12.1 U6.5 | length 304.7
  Top Layer w9: U6.5 1220.08,1252.52
  Top Layer w27: 1220.08,1252.52 C12.1
NetC13_2: C13.2 U9.2 | length 166.1
  Top Layer w9: 1038.98,667.52 1120.67,667.52 U9.2
  Top Layer w27: C13.2 1038.98,667.52
NetC14_1: C14.1 U9.3 | length 166.1
  Top Layer w9: U9.3 1169.88,667.52 1239.76,667.52
  Top Layer w27: 1239.76,667.52 C14.1
NetC15_2: C15.2 U10.2 | length 163.4
  Top Layer w9: 1046.85,1017.52 1120.67,1017.52 U10.2
  Top Layer w27: C15.2@958.04,1017.52 1046.85,1017.52
NetC16_1: C16.1 U10.3 | length 166.2
  Top Layer w9: U10.3 1170.66,1017.52 1224.02,1017.52
  Top Layer w27: 1224.02,1017.52 C16.1
OUT_A: RF1.1 U2.8 | length 425
  Top Layer w9: U2.8 1905.9,1945.91
  Top Layer w27: 1905.9,1945.91 2127.64,1945.91 2129.38,1944.16 RF1.1
OUT_B: RF3.1 U7.8 | length 416.8
  Top Layer w9: U7.8 1899.04,843.15
  Top Layer w27: 1899.04,843.15 2130.91,843.15 RF3.1
pads on no net: B1.1 B2.1 U2. U2.3 U3. U3.3 U7. U7.3 U8. U8.3

## Polygon pours and split planes (outlines as drawn)
GND on Top Layer "gnd" (solid, remove dead copper, pour order 4): 39.37,39.37 39.37,2716.54 2322.83,2716.54 2322.83,39.37
GND on Bottom Layer "gnd" (solid, remove dead copper, pour order 7): 39.37,39.37 39.37,2716.54 2322.83,2716.54 2322.83,39.37

## Keep-outs
Keep-Out Layer:
  circle w10: c2113.28,2465.52 r98.43
  circle w10: c228.28,258.52 r98.43
  lines w5: 19.68,19.68 2342.52,19.68 2342.52,2736.22 19.68,2736.22 19.68,19.68

## Other copper
Top Layer:
  pour cut-out: 2049.38,1914.16 2028.17,1929.11 2049.56,1937.96
  pour cut-out: 2049.38,1986.16 2026.38,1964.16 2049.38,1957.16
  pour cut-out: 2044.96,807.09 2023.85,820.24 2045.13,828.13
  pour cut-out: 2044.96,879.09 2023.78,863.08 2044.74,860.42
  pour cut-out: 302.54,804.16 323.76,820.89 302.76,822.83
  pour cut-out: 302.54,876.16 331.35,863.07 301.97,860.63
  pour cut-out: 305.15,1910.46 326.26,1925.03 305.37,1931.1
  pour cut-out: 305.15,1982.46 326.34,1967.87 304.98,1964.17

## Silkscreen, mask and mechanical layers (free items; w line width, h text height)
Top Overlay:
  lines w10: 1220.69,286.03 1299.43,286.03 ; 1230.54,266.35 1289.59,266.35 ; 1244,2485.77 1322.74,2485.77 ; 1250.22,246.66 1269.91,246.66 ; 1253.84,2505.46 1312.9,2505.46 ; 1260.06,286.03 1260.06,305.72 ; 1273.53,2525.14 1293.21,2525.14 ; 1283.37,2466.09 1283.37,2485.77 ; 189.28,2139.52 368.28,2139.52 368.28,2653.52 189.28,2653.52 189.28,2139.52
  text "4" at 900.26,2521.62 h50 r180
  text "2" at 1097.11,2517.68 h50 r180
  text "3" at 998.68,2513.75 h50 r180
  text "1" at 1191.6,2513.75 h50 r180
  text "FILTROS" at 318.25,2166.52 h70 r90
  text "IN_A" at 291.25,1488.52 h70 r90
  text "OUT_A" at 2239.19,1429.45 h70 r90
  text "IN_B" at 253.25,413.52 h70 r90
  text "4" at 847.5,248.61 h50
  text "1" at 1154.59,248.61 h50
  text "3" at 949.87,244.67 h50
  text "2" at 1056.17,244.67 h50
  text "OUT_B" at 2246.25,238.52 h70 r90
Mechanical 1:
  the board outline again, w10

## Dimensions
2362.2,2755.91 to 2362.2,0 on Mechanical 12
0,0 to 2362.2,0 on Mechanical 12